# Altium PCB UZ_D_Template.PcbDoc
Units mm, origin at the board's own origin, x right, y up, seen from the top; angles counter-clockwise.
Board outline 155.99 x 100.01 mm, 4 copper layers (Top Layer, Layer 1, Layer 2, Bottom Layer), stack 0.98 mm thick; 60 components, 84 nets, 455 pads, 0 vias.
Unrouted connection lines stored in the file: 410.
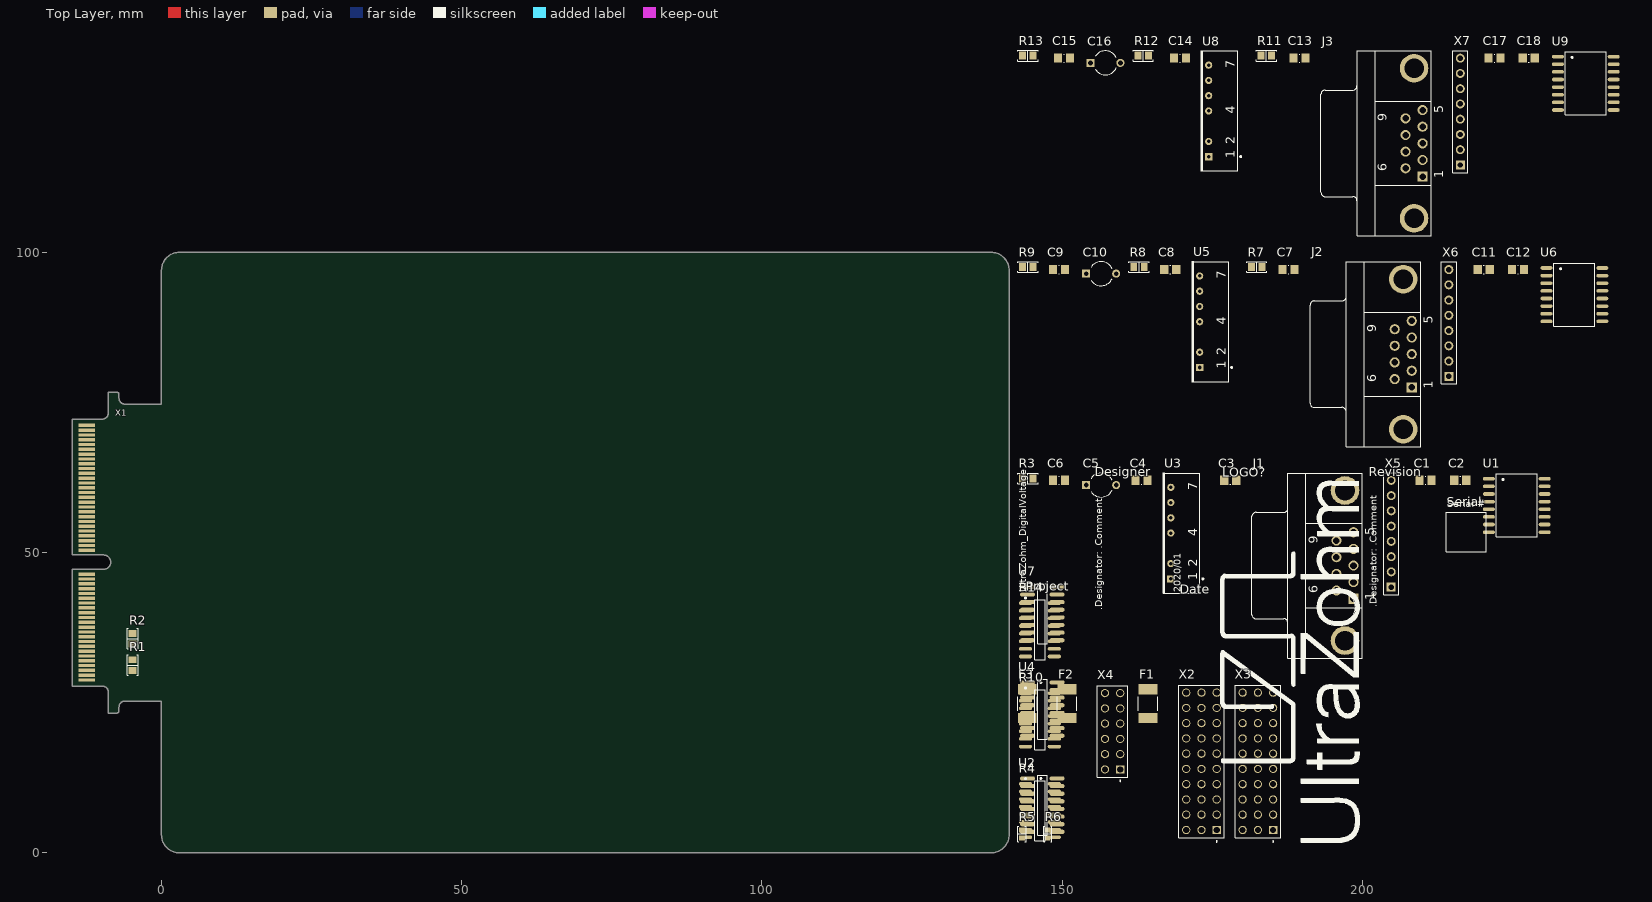
[diagram p0: Top Layer view]
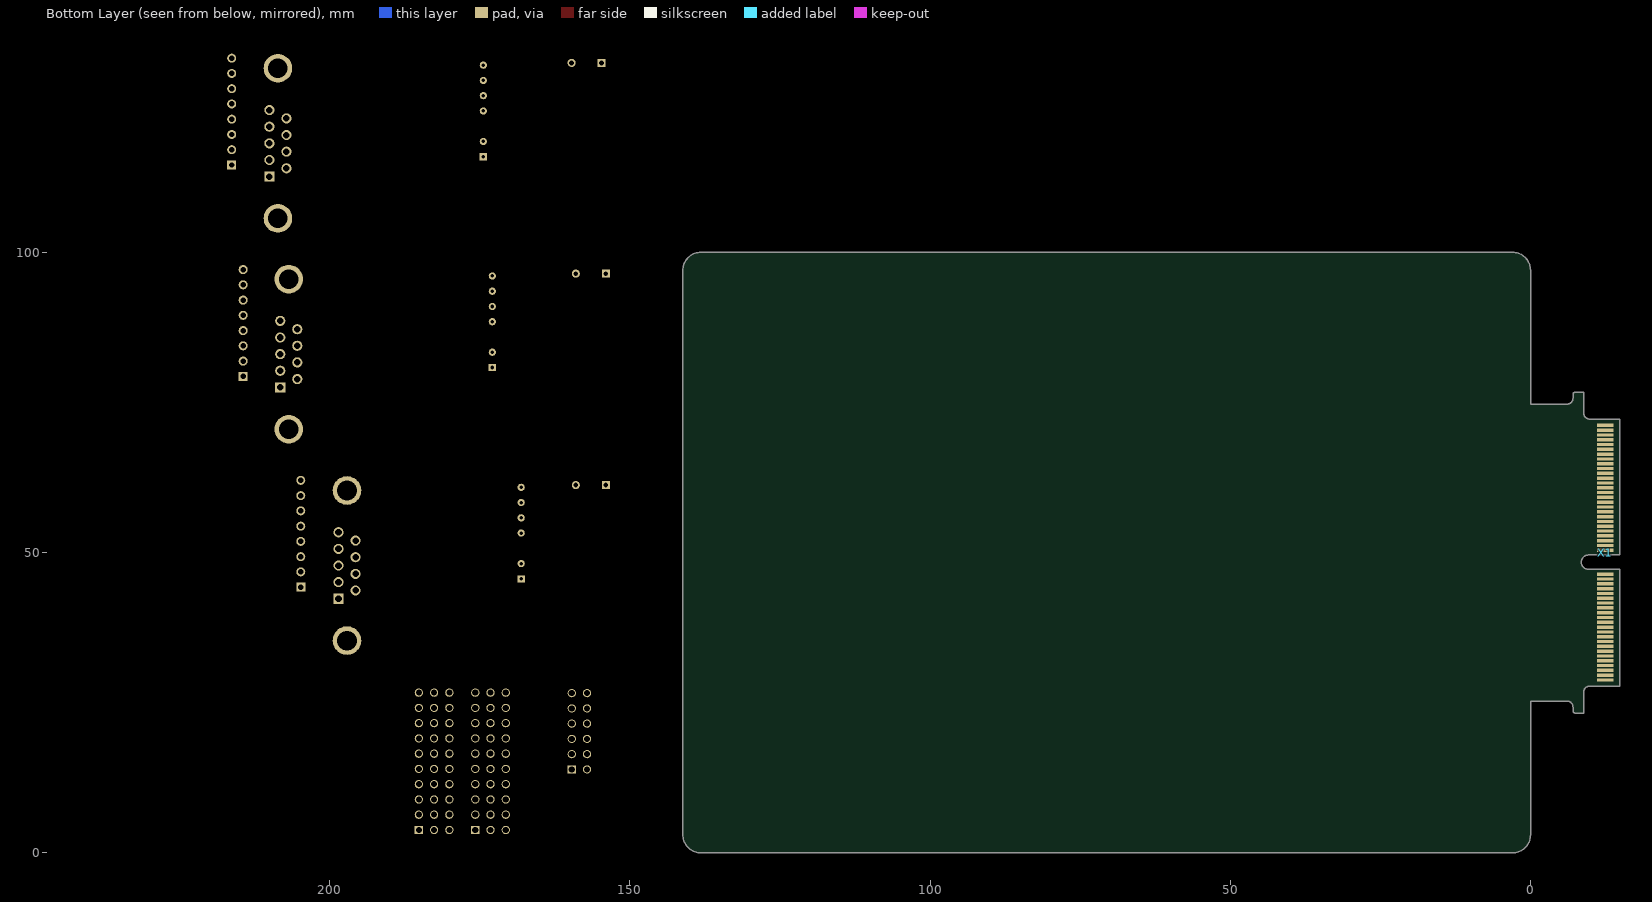
[diagram p1: Bottom Layer view, seen from below]

## Layer stack, top to bottom
Top Solder: solder mask 0.0102, Solder Resist, Dk 3.5
Top Layer: signal copper 0.035
Dielectric 2: prepreg 0.115, FR-4, Dk 4.4
Dielectric 4: prepreg 0.115, FR-4, Dk 4.4
Layer 1: signal copper 0.035
Dielectric 1: core 0.38, Core-036, Dk 4.4
Layer 2: signal copper 0.035
Dielectric 5: prepreg 0.115, FR-4, Dk 4.4
Dielectric 3: prepreg 0.115, FR-4, Dk 4.4
Bottom Layer: signal copper 0.035
Bottom Solder: solder mask 0.0102, Solder Resist, Dk 3.5

## Board outline
-14.853,27.775 -9.853,27.775 cw(c-9.853,26.775) -8.853,26.775 -8.853,23.275 -7.473,23.275 ccw(c-7.473,23.675) -7.073,23.675 -7.073,24.275 cw(c-6.073,24.275) -6.073,25.275 0,25.275 0,3 ccw(c3,3) 3,0 138.141,0 ccw(c138.141,3) 141.141,3 141.141,97 141.141,97.01 ccw(c138.141,97.01) 138.141,100.01 3,100 ccw(c3,97) 0,97 0,74.725 -6.073,74.725 cw(c-6.073,75.725) -7.073,75.725 -7.073,76.325 ccw(c-7.473,76.325) -7.473,76.725 -8.853,76.725 -8.853,73.225 cw(c-9.853,73.225) -9.853,72.225 -14.853,72.225 -14.853,49.6 -9.653,49.6 cw(c-9.653,48.4) -9.653,47.2 -14.853,47.2

## Design rules (kind name [scope] priority, off if disabled: settings)
AssemblyTestPointUsage [InNetClass('3V3_SingleEnded') or InNetClass('5V_SingleEnded') or InNetClass('15V_SingleEnded') or InNetClass('DifferentialSignals')] p1:
Clearance Clearance_Differential [InNetClass('DifferentialSignals')] p1: gap=0.1 ignorepadtopadclearanceinfootprint=TRUE except(0: Arc-Hole Track-Hole SMDPad-Hole THPad-Hole Via-Hole Fill-Hole Poly-Hole Region-Hole Text-Hole; 0.3: SMDPad-Via; 0.4: THPad-Via)
Clearance Clearance_Power [InNetClass('Power')] p2: gap=0.1 ignorepadtopadclearanceinfootprint=TRUE except(0: Arc-Hole Track-Hole SMDPad-Hole THPad-Hole Via-Hole Fill-Hole Poly-Hole Region-Hole Text-Hole; 0.15: Via-Poly; 0.2: Track-Poly; 0.25: THPad-Poly; 0.3: Fill-Poly Poly-Region; 0.5: Poly-Poly)
Clearance [All] p3: gap=0.1 ignorepadtopadclearanceinfootprint=TRUE except(0: Arc-Hole Track-Hole SMDPad-Hole THPad-Hole Via-Hole Fill-Hole Poly-Hole Region-Hole Text-Hole; 0.4: SMDPad-Via THPad-Via; 0.5: Poly-Poly)
ComponentClearance [All] p1: gap=0.1 collisioncheckmode=3 verticalgap=0.1 showdistances=FALSE
DiffPairsRouting [InNetClass('DifferentialSignals')] p1: maxlimit=0.25 minlimit=0.127 mostfreqgap=0.25 toplayer_maxgap=0.127 toplayer_prefgap=0.127 toplayer_minwidth=0.285 toplayer_maxwidth=0.285 toplayer_prefwidth=0.285 midlayer1_minwidth=0.069 midlayer1_maxwidth=0.15 midlayer1_prefwidth=0.15 midlayer2_mingap=0.165 midlayer2_minwidth=0.1 midlayer2_maxwidth=0.15 midlayer2_prefwidth=0.15 bottomlayer_maxgap=0.127 bottomlayer_prefgap=0.127 bottomlayer_minwidth=0.285 bottomlayer_maxwidth=0.285 bottomlayer_prefwidth=0.285 impedanceprofiledriven=TRUE impedanceprofileid={5F7DE71B-7B0B-4CDE-8AE7-8AD61221F3A5} impedanceprofilevalue=100.000000 maxuncoupledlength=12.7
FanoutControl Fanout_Power [InNetClass('Power') or InNet('ENABLE')] p1: bgadir=Out bgaviamode=Centered fanoutstyle=Auto fanoutdirection=None viagrid=0.025
FanoutControl Fanout_RS422 [InNetClass('DifferentialSignals')] p2: bgadir=Out bgaviamode=Closest fanoutstyle=Rows fanoutdirection=OutOnly viagrid=0.025
FanoutControl Fanout_BGA [IsBGA] p3 off: bgadir=Out bgaviamode=Centered fanoutstyle=Auto fanoutdirection=Alternating viagrid=0.025 // Fanout_BGA (Default Rule)
FanoutControl Fanout_LCC [IsLCC] p4 off: bgadir=Out bgaviamode=Centered fanoutstyle=Auto fanoutdirection=Alternating viagrid=0.025 // Fanout_LCC (Default Rule)
FanoutControl Fanout_SOIC [IsSOIC] p5 off: bgadir=Out bgaviamode=Centered fanoutstyle=Auto fanoutdirection=Alternating viagrid=0.025 // Fanout_SOIC (Default Rule)
FanoutControl Fanout_Small [(CompPinCount < 5)] p6 off: bgadir=Out bgaviamode=Centered fanoutstyle=Auto fanoutdirection=OutThenIn viagrid=0.025 // Fanout_Small (Default Rule)
FanoutControl Fanout_Default [All] p7: bgadir=NE bgaviamode=Closest fanoutstyle=Rows fanoutdirection=InOnly viagrid=0.025 // Fanout_Default (Default Rule)
Height [All] p1: minheight=0 maxheight=50 prefheight=12.7
HoleSize [All] p1: absolutevalues=TRUE maxlimit=4 minlimit=0.025 maxpercent=80.000 minpercent=20.000
PolygonConnect PolygonConnect_Therm [HoleSize > 2.6] p1: connectstyle=Direct reliefconductorwidth=0.254 reliefentries=4 polygonreliefangle="90 Angle" airgapwidth=0.254
PolygonConnect PolygonConnect_via [InPadClass('pad') or IsVia] p2: connectstyle=Direct reliefconductorwidth=0.254 reliefentries=4 polygonreliefangle="90 Angle" airgapwidth=0.254
PolygonConnect [All] p3: connectstyle=Relief reliefconductorwidth=0.3 reliefentries=4 polygonreliefangle="90 Angle" airgapwidth=0.25
RoomDefinition Encoder2 [InComponentClass('Encoder2')] p1: confinementstyle=ConfineIn formatcopy=TRUE lockcomponents=FALSE outline 142.279,17.547 151.179,17.547 151.179,32.247 142.279,32.247
RoomDefinition Encoder1 [InComponentClass('Encoder1')] p2: confinementstyle=ConfineIn formatcopy=TRUE lockcomponents=FALSE outline 142.279,1.547 151.179,1.547 151.179,16.247 142.279,16.247
RoomDefinition Encoder3 [InComponentClass('Encoder3')] p3: confinementstyle=ConfineIn formatcopy=TRUE lockcomponents=FALSE outline -46.221,-26.353 4.579,-26.353 4.579,-0.953 -46.221,-0.953
RoomDefinition X1 [InComponentClass('X1')] p4: confinementstyle=ConfineIn formatcopy=TRUE lockcomponents=FALSE outline -46.221,-26.353 4.579,-26.353 4.579,-0.953 -46.221,-0.953
RoomDefinition Connector [InComponentClass('Connector')] p5: confinementstyle=ConfineIn formatcopy=TRUE lockcomponents=FALSE outline 142.279,1.547 186.879,1.547 186.879,30.947 142.279,30.947
RoutingLayers RoutingLayers_3V3Signals [InNetClass('3V3_SingleEnded')] p1 off: top layer_v5=TRUE mid layer 1_v5=TRUE mid layer 2_v5=TRUE bottom layer_v5=TRUE
RoutingLayers RoutingLayers_SingleEnded [InNetClass('15V_SingleEnded') or InNetClass('3V3_SingleEnded') or InNetClass('5V_SingleEnded')] p2 off: top layer_v5=TRUE mid layer 1_v5=TRUE mid layer 2_v5=TRUE bottom layer_v5=TRUE
RoutingLayers RoutingLayers_Differential [InNetClass('DifferentialSignals')] p3 off: top layer_v5=TRUE mid layer 1_v5=TRUE mid layer 2_v5=TRUE bottom layer_v5=FALSE
RoutingLayers [All] p4: top layer_v5=TRUE mid layer 1_v5=TRUE mid layer 2_v5=TRUE bottom layer_v5=TRUE
RoutingVias [All] p1: holewidth=0.3 width=0.5 viastyle="Through Hole" minholewidth=0.2 minwidth=0.4 maxholewidth=0.5 maxwidth=1
SolderMaskExpansion [All] p1: expansion=0.102 istentingtop=FALSE
UnRoutedNet UnRoutedNet_Signals [InNetClass('15V_SingleEnded') or InNetClass('3V3_SingleEnded') or InNetClass('5V_SingleEnded') or InNetClass('DifferentialSignals')] p1: checkbadconnections=TRUE
UnRoutedNet [All] p2: checkbadconnections=TRUE
Width Width_Power [InNetClass('Power')] p1: maxlimit=10 minlimit=0.2 preferedwidth=0.3 minimp=50.000000 maximp=50.000000 favimp=50.000000
Width [All] p2: maxlimit=10 minlimit=0.1 preferedwidth=0.3 midlayer1_prefwidth=0.15 midlayer2_prefwidth=0.15 minimp=50.000000 maximp=50.000000 favimp=50.000000
18 further rules are at their usual default settings.

## Classes and differential pairs
component class Encoder2: C7 C8 C9 C10 C11 C12 J2 R7 R8 R9 R10 U4 U5 U6 X6
component class Encoder1: C1 C2 C3 C4 C5 C6 J1 R1 R2 R3 R4 U1 U2 U3 X5
component class Encoder3: C13 C14 C15 C16 C17 C18 J3 R11 R12 R13 R14 U7 U8 U9 X7
component class Connector: F1 F2 F3 X2 X3 X4
component class X1: R5 R6 X1

## Components (designator, comment, footprint, x,y, rotation, side; value= is the part's Value field where it differs from the comment)
C1 "0.1 µF" C_0805 210.479,62.047 r0 top
C2 "0.1 µF" C_0805 216.279,62.047 r0 top
C3 "0.01 µF" C_0805 177.979,62.047 r0 top
C4 "0.01 µF" C_0805 163.179,62.047 r0 top
C5 "10 µF" CAPR5-4X5 156.479,61.247 r0 top
C6 "0.01 µF" C_0805 149.479,62.047 r0 top
C7 "0.01 µF" C_0805 187.679,97.147 r0 top
C8 "0.01 µF" C_0805 167.979,97.147 r0 top
C9 "0.01 µF" C_0805 149.479,97.147 r0 top
C10 "10 µF" CAPR5-4X5 156.479,96.447 r0 top
C11 "0.1 µF" C_0805 220.179,97.147 r0 top
C12 "0.1 µF" C_0805 225.879,97.147 r0 top
C13 "0.01 µF" C_0805 189.479,132.347 r0 top
C14 "0.01 µF" C_0805 169.579,132.347 r0 top
C15 "0.01 µF" C_0805 150.279,132.347 r0 top
C16 "10 µF" CAPR5-4X5 157.179,131.547 r0 top
C17 "0.1 µF" C_0805 221.979,132.347 r0 top
C18 "0.1 µF" C_0805 227.679,132.347 r0 top
Date "2020/01" COMMENT 169.479,42.247 r90 top
Designer "Michaela Hlatky" Designator:comment 156.479,40.547 r90 top
F1 "Littelfuse_PTC_1812" 1812_PTC_Polyfuse_Littelfuse 164.279,24.847 r90 top value="PTC, 1.1 A, 24V"
F2 "Littelfuse_PTC_1812" 1812_PTC_Polyfuse_Littelfuse 150.779,24.847 r90 top value="PTC, 1.1 A, 24V"
F3 "Littelfuse_PTC_1812" 1812_PTC_Polyfuse_Littelfuse 144.179,24.847 r90 top value="PTC, 1.1 A, 24V"
J1 "DSUB1.385-2H9" DSUB1.385-2H9 187.579,47.847 r90 top
J2 "DSUB1.385-2H9" DSUB1.385-2H9 197.279,83.047 r90 top
J3 "DSUB1.385-2H9" DSUB1.385-2H9 199.079,118.147 r90 top
LOGO? "UZ Logo" UZ_Logo_large 199.479,2.047 r90 top
Project "UltraZohm_DigitalVoltage" COMMENT 143.779,42.247 r90 top
R1 "120" "RES 0805_2012" -4.8,31.275 r90 top value=11k8
R2 "120" "RES 0805_2012" -4.8,35.675 r90 top value=11k8
R3 "120" "RES 0805_2012" 144.279,62.347 r0 top value=11k8
R4 "Res Pack3" SO-16_N 146.279,7.047 r0 top value=4.7K
R5 "R_TF" "RES 0603_1608" 143.279,3.147 r90 top value=0R
R6 "R_TF" "RES 0603_1608" 147.579,3.147 r90 top value=0R
R7 "120" "RES 0805_2012" 182.379,97.547 r0 top value=11k8
R8 "120" "RES 0805_2012" 162.779,97.547 r0 top value=11k8
R9 "120" "RES 0805_2012" 144.279,97.547 r0 top value=11k8
R10 "Res Pack3" SO-16_N 146.279,22.147 r0 top value=4.7K
R11 "120" "RES 0805_2012" 183.979,132.747 r0 top value=11k8
R12 "120" "RES 0805_2012" 163.479,132.747 r0 top value=11k8
R13 "120" "RES 0805_2012" 144.279,132.747 r0 top value=11k8
R14 "Res Pack3" SO-16_N 146.279,37.147 r0 top value=4.7K
Revision "1v00" Designator:comment 202.179,41.047 r90 top
Serial "Serial #" SERIAL 215.979,55.547 r0 top
U1 "ISO7230MDW" "TI ISO7230 SOIC" 225.679,57.847 r0 top
U2 "DS26LS32ACM" M16A_M 146.679,7.947 r0 top
U3 "TMH 0505S" SIL-6(7) 168.079,53.247 r90 top
U4 "DS26LS32ACM" M16A_M 146.679,23.947 r0 top
U5 "TMH 0505S" SIL-6(7) 172.879,88.447 r90 top
U6 "ISO7230MDW" "TI ISO7230 SOIC" 235.279,92.947 r0 top
U7 "DS26LS32ACM" M16A_M 146.679,39.847 r0 top
U8 "TMH 0505S" SIL-6(7) 174.379,123.547 r90 top
U9 "ISO7230MDW" "TI ISO7230 SOIC" 237.179,128.147 r0 top
X1 "HSEC8-150-01-XX-DV-A-BL-CARD" HSEC8-150-01-XX-DV-A-BL-CARD -14.84,49.991 r270 bottom
X2 "Pin Header" SAMTEC_TSW-110-07-F-T 173.179,15.247 r90 top
X3 "Pin Header" SAMTEC_TSW-110-07-F-T 182.579,15.247 r90 top
X4 "Pin Header" SAMTEC_TSW-106-07-F-D 158.379,20.247 r90 top
X5 "Pin Header" HDR1X8 204.779,44.247 r90 top
X6 "Pin Header" HDR1X8 214.379,79.347 r90 top
X7 "Pin Header" HDR1X8 216.279,114.547 r90 top

## Footprints (in the part's own frame and the unit in brackets; to place one, negate y for a bottom-side part, rotate by r counter-clockwise, add the part's x,y. Pads: shape width x height; smd on the part's side, far side on the other; paste and mask are expansions set on the pad)
1812_PTC_Polyfuse_Littelfuse [mm] "Chip Fuse, 2-Leads, Body 4.6x3.24mm"
  rect 1.68x3.14 smd: 1(-2.39,0) 2(2.39,0)
  silkscreen extent -1.15,-1.62 1.15,1.62, body extent -2.3,-1.62 2.3,1.62, height 1.15
C_0805 [mm] "Chip Capacitor, Body 2.0x1.2mm, Height 1.45mm, IPC Low Density"
  rect 1.35x1.55 smd: 1(-1,0) 2(1,0)
  silkscreen extent -0.05,-0.67 0.05,0.67, body extent -1.1,-0.72 1.1,0.72, height 1.45
CAPR5-4X5 [mm] "Capacitor; 2 Leads"
  rect 1.35x1.35 hole 0.8: 1(-2.5,0)
  round 1.35 hole 0.8: 2(2.5,0)
  silkscreen extent -1.69,-2 1.82,2
COMMENT [mm] "prints out the comment of a component"
Designator:comment [mm] "prints out designator and comment of a component"
DSUB1.385-2H9 [mm] "Connector; D Subminiature; 9 Position; Right Angle; Pitch 1.385 mm"
  rect 1.69x1.69 hole 1.09: 1(-5.54,-10.92)
  round 1.69 hole 1.09: 2(-2.77,-10.92) 3(0,-10.92) 4(2.77,-10.92) 5(5.54,-10.92) 6(-4.155,-8.08) 7(-1.385,-8.08) 8(1.385,-8.08) 9(4.155,-8.08)
  round 4.76 hole 3.26: 10(-12.495,-9.5) 11(12.495,-9.5)
  silkscreen extent -15.4,-12.4 15.4,6
HDR1X8 [mm] "Connector; Header; 8 Position"
  rect 1.5x1.5 hole 0.9: 1(0,0)
  round 1.5 hole 0.9: 2(2.54,0) 3(5.08,0) 4(7.62,0) 5(10.16,0) 6(12.7,0) 7(15.24,0) 8(17.78,0)
  silkscreen extent -1.27,-1.27 19.05,1.27
HSEC8-150-01-XX-DV-A-BL-CARD [mm]
  rect 0.55x2.8 smd far side mask+0.05: 1(-21.2,-2.4) 3(-20.4,-2.4) 5(-19.6,-2.4) 7(-18.8,-2.4) 9(-18,-2.4) 11(-17.2,-2.4) 13(-16.4,-2.4) 15(-15.6,-2.4) 17(-14.8,-2.4) 19(-14,-2.4) 21(-13.2,-2.4) 23(-12.4,-2.4) 25(-11.6,-2.4) 27(-10.8,-2.4) 29(-10,-2.4) 31(-9.2,-2.4) 33(-8.4,-2.4) 35(-7.6,-2.4) 37(-6.8,-2.4) 39(-6,-2.4) 41(-5.2,-2.4) 43(-4.4,-2.4) 45(-3.6,-2.4) 47(-2.8,-2.4) 49(-2,-2.4) 51(-1.2,-2.4) 53(-0.4,-2.4) 55(3.6,-2.4) 57(4.4,-2.4) 59(5.2,-2.4) 61(6,-2.4) 63(6.8,-2.4) 65(7.6,-2.4) 67(8.4,-2.4) 69(9.2,-2.4) 71(10,-2.4) 73(10.8,-2.4) 75(11.6,-2.4) 77(12.4,-2.4) 79(13.2,-2.4) 81(14,-2.4) 83(14.8,-2.4) 85(15.6,-2.4) 87(16.4,-2.4) 89(17.2,-2.4) 91(18,-2.4) 93(18.8,-2.4) 95(19.6,-2.4) 97(20.4,-2.4) 99(21.2,-2.4)
  rect 0.55x2.8 smd mask+0.05: 2(-21.2,-2.4) 4(-20.4,-2.4) 6(-19.6,-2.4) 8(-18.8,-2.4) 10(-18,-2.4) 12(-17.2,-2.4) 14(-16.4,-2.4) 16(-15.6,-2.4) 18(-14.8,-2.4) 20(-14,-2.4) 22(-13.2,-2.4) 24(-12.4,-2.4) 26(-11.6,-2.4) 28(-10.8,-2.4) 30(-10,-2.4) 32(-9.2,-2.4) 34(-8.4,-2.4) 36(-7.6,-2.4) 38(-6.8,-2.4) 40(-6,-2.4) 42(-5.2,-2.4) 44(-4.4,-2.4) 46(-3.6,-2.4) 48(-2.8,-2.4) 50(-2,-2.4) 52(-1.2,-2.4) 54(-0.4,-2.4) 56(3.6,-2.4) 58(4.4,-2.4) 60(5.2,-2.4) 62(6,-2.4) 64(6.8,-2.4) 66(7.6,-2.4) 68(8.4,-2.4) 70(9.2,-2.4) 72(10,-2.4) 74(10.8,-2.4) 76(11.6,-2.4) 78(12.4,-2.4) 80(13.2,-2.4) 82(14,-2.4) 84(14.8,-2.4) 86(15.6,-2.4) 88(16.4,-2.4) 90(17.2,-2.4) 92(18,-2.4) 94(18.8,-2.4) 96(19.6,-2.4) 98(20.4,-2.4) 100(21.2,-2.4)
M16A_M [mm] "SOIC, 16-Leads, Body 9.9x3.9mm, Pitch 1.27mm, IPC Low Density"
  oval 2.5x0.7 smd: 1(-2.45,4.445) 2(-2.45,3.175) 3(-2.45,1.905) 4(-2.45,0.635) 5(-2.45,-0.635) 6(-2.45,-1.905) 7(-2.45,-3.175) 8(-2.45,-4.445) 9(2.45,-4.445) 10(2.45,-3.175) 11(2.45,-1.905) 12(2.45,-0.635) 13(2.45,0.635) 14(2.45,1.905) 15(2.45,3.175) 16(2.45,4.445)
  silkscreen extent -0.8,-5 0.8,5, body extent -2,-5 2,5, height 1.75
"RES 0603_1608" [mm] "Chip Resistor, 2-Leads, Body 1.60x0.80mm, IPC Medium Density"
  rect 0.85x0.95 smd: 1(-0.65,0) 2(0.65,0)
  silkscreen extent -1.27,-0.7 1.27,0.7, body extent -0.8,-0.4 0.8,0.4, height 0.45
"RES 0805_2012" [mm] "Chip Resistor, 2-Leads, Body 2.00x1.25mm, IPC Medium Density"
  rect 1.15x1.35 smd: 1(-0.875,0) 2(0.875,0)
  silkscreen extent -1.7,-0.9 1.7,0.9, body extent -1,-0.62 1,0.63, height 0.6
SAMTEC_TSW-106-07-F-D [mm]
  rect 1.37x1.37 hole 1.02: 01(-6.35,-1.27)
  round 1.37 hole 1.02: 02(-6.35,1.27) 03(-3.81,-1.27) 04(-3.81,1.27) 05(-1.27,-1.27) 06(-1.27,1.27) 07(1.27,-1.27) 08(1.27,1.27) 09(3.81,-1.27) 10(3.81,1.27) 11(6.35,-1.27) 12(6.35,1.27)
  silkscreen extent -8.37,-2.54 7.62,2.54
SAMTEC_TSW-110-07-F-T [mm]
  rect 1.37x1.37 hole 1.02: 01(-11.43,-2.54)
  round 1.37 hole 1.02: 02(-11.43,0) 03(-11.43,2.54) 04(-8.89,-2.54) 05(-8.89,0) 06(-8.89,2.54) 07(-6.35,-2.54) 08(-6.35,0) 09(-6.35,2.54) 10(-3.81,-2.54) 11(-3.81,0) 12(-3.81,2.54) 13(-1.27,-2.54) 14(-1.27,0) 15(-1.27,2.54) 16(1.27,-2.54) 17(1.27,0) 18(1.27,2.54) 19(3.81,-2.54) 20(3.81,0) 21(3.81,2.54) 22(6.35,-2.54) 23(6.35,0) 24(6.35,2.54) 25(8.89,-2.54) 26(8.89,0) 27(8.89,2.54) 28(11.43,-2.54) 29(11.43,0) 30(11.43,2.54)
  silkscreen extent -13.45,-3.81 12.7,3.81
SERIAL [mm]
  silkscreen extent -2,-5.4 4.6,1.2
SIL-6(7) [mm] "SIP; 7 Leads (1 Absent); Body 19.5 x 6 mm (LxW typ); Pitch 2.54 mm"
  rect 1.2x1.2 hole 0.6: 1(-7.62,0)
  round 1.2 hole 0.6: 2(-5.08,0) 4(0,0) 5(2.54,0) 6(5.08,0) 7(7.62,0)
  silkscreen extent -10.1,-5.46 10.1,1.35, body extent -10.13,-6.47 9.37,1.13, height 10.5
SO-16_N [mm] "SOIC, 16-Leads, Body 9.9x3.9mm, Pitch 1.27mm, IPC Medium Density"
  oval 2.2x0.6 smd: 1(-2.4,4.445) 2(-2.4,3.175) 3(-2.4,1.905) 4(-2.4,0.635) 5(-2.4,-0.635) 6(-2.4,-1.905) 7(-2.4,-3.175) 8(-2.4,-4.445) 9(2.4,-4.445) 10(2.4,-3.175) 11(2.4,-1.905) 12(2.4,-0.635) 13(2.4,0.635) 14(2.4,1.905) 15(2.4,3.175) 16(2.4,4.445)
  silkscreen extent -2.52,-5 0.9,5.42, body extent -2,-5 2,5, height 1.75
"TI ISO7230 SOIC" [mm] "SOIC, 16-Leads, Body 10,30x7,50mm, Pitch 1,27mm, IPC Medium Density"
  oval 2x0.6 smd: 1(-4.65,4.445) 2(-4.65,3.175) 3(-4.65,1.905) 4(-4.65,0.635) 5(-4.65,-0.635) 6(-4.65,-1.905) 7(-4.65,-3.175) 8(-4.65,-4.445) 9(4.65,-4.445) 10(4.65,-3.175) 11(4.65,-1.905) 12(4.65,-0.635) 13(4.65,0.635) 14(4.65,1.905) 15(4.65,3.175) 16(4.65,4.445)
  silkscreen extent -3.4,-5.25 3.4,5.25, body extent -3.8,-5.25 3.8,5.25, height 2.65
UZ_Logo_large [mm] "logo width 6cm"
  silkscreen extent -0.3,-0.06 59.86,23.1

## Part data
C1 C2 C11 C12 C17 C18: library part C0805C104J5RECTU, "Capacitor 0805, 50 VDC, 0.1 µF, X7R", Device Package=0805, Manufacturer=KEMET, Operating Temperature="-55 - 125°C", Supplier Part Number 1=80-C0805C104J5RECTU, Tolerance="5 %", Voltage Rating="50 VDC", Component Type="Capacitor 0805", ComponentLink1Description=Datasheet, ComponentLink1URL=https://www.mouser.de/datasheet/2/212/KEM_C1002_X7R_SMD-1102033.pdf, Created from=MGremer, Created On="20.12.2020 13:54:13", Last Updated="20.12.2020 16:34:30", Live Cycle Status=1, Manufacturer Part Number=C0805C104J5RECTU, Mounting Type=SMD, PartID=17, Series="SMD Comm X7R", Stock number="Labor SMD Container", Supplier 1=Mouser, Type=Capacitor
C3 C4 C6 C7 C8 C9 C13 C14 C15: library part GRM21BR72A103KA01L, "Capacitor 0805, 100 VDC, 0.01 µF, X7R", Device Package=0805, Manufacturer="Murata Electronics", Operating Temperature="-55 - 125°C", Supplier Part Number 1=81-GRM21BR72A103K, Tolerance="10 %", Voltage Rating="100 VDC", Component Type="Capacitor 0805", ComponentLink1Description=Datasheet, ComponentLink1URL=https://www.mouser.de/datasheet/2/281/1/GRM21BR72A103KA01_01C-1986947.pdf, Created from=MGremer, Created On="20.12.2020 13:54:13", Last Updated="17.11.2021 11:27:00", Live Cycle Status=1, Manufacturer Part Number=GRM21BR72A103KA01L, Mounting Type=SMD, PartID=86, Series=GRM, Stock number="not stored", Supplier 1=Mouser, Type=Capacitor
C5 C10 C16: library part CAPR5-4X5, "Capacitor; 2 Leads", Component Type=Capacitor, ComponentLink1Description=Datasheet, Created from=MHlatky, Created On="25.05.2021 10:46:00", Last Updated="30.11.2021 13:37:41", Live Cycle Status=1, Manufacturer Part Number=CAPR5-4X5, PackageDescription="Capacitor; 2 Leads", PackageReference=CAPR5-4X5, PartID=5, Published=23-Sep-2002, Publisher="Altium Limited", Supplier Part Number 1=CAPR5-4X5, Type=Capacitor
Date: library part 5, "Create a project parameter named \"FinDate\" this is the value of this component. It is printed on the PCB. Once the parameter is updated (e.g. new revision) it gets updated on the PCB as well", Manufacturer="PCB Manufacturer", Manufacturer Part Number="Project End Date", Component Type="Date of Project Finalization", Created from="T. Wendt", Created On="01.03.2021 09:01:41", Last Updated="01.03.2021 09:01:41", Live Cycle Status=1, PartID=5, Type="Standard (No BOM)"
Designer: library part 4, "Create a project parameter named \"Author\" this is the value of this component. It is printed on the PCB. Once the parameter is updated (e.g. new revision) it gets updated on the PCB as well", Manufacturer="PCB Manufacturer", Manufacturer Part Number="Project Author", Component Type="Project Author", Created from="T. Wendt", Created On="01.03.2021 08:53:41", Last Updated="01.03.2021 09:20:27", Live Cycle Status=1, PartID=4, Type="Standard (No BOM)"
F1 F2 F3: "POLYSWITCH RESETTABLE DEVICES", Hold Current=1.1A, Manufacturer=Littelfuse, MPN=miniASMDC110F/24, Nominal current="1 A", Operating Temperature="-40 - 85 °C", Package=1812, Resistance="0.18 Ohm", Trip Current=2.2A, Voltage=24V, Component Type=Littelfuse_PTC_1812, ComponentLink1Description=Datasheet, ComponentLink1URL=https://www.littelfuse.com/~/media/electronics/datasheets/resettable_ptcs/littelfuse_ptc_surface_mount_catalog_datasheet.pdf.pdf, Created=2019_02_10_AGeiger, Created from=MHlatky, Created On="07.05.2021 06:50:33", Last Updated="20.12.2021 12:44:16", Live Cycle Status=1, Manufacturer Part Number=Littelfuse_PTC_1812, MF=Littelfuse, Mounting Type=SMD, PartID=5, Type=Fuse
J1 J2 J3: "Connector; D Subminiature; 9 Position; Right Angle; Pitch 1.385 mm", Device Package=-, Manufacturer=Altium, PackageDocument=O, Component Type="DSUB Connector", ComponentLink1Description=Datasheet, ComponentLink1URL=[NULL], Created from=MHlatky, Created On="26.01.2021 09:19:51", DatasheetDocument=1-Sep-1999, Gender=Receptacle, Last Updated="20.12.2021 09:43:18", LatestRevisionDate=17-Jul-2002, LatestRevisionNote="Re-released for DXP Platform.", Live Cycle Status=1, Manufacturer Part Number=DSUB1.385-2H9, Orientation="Right Angle", PackageReference=788750, PartID=15, Positions=9, Published=15-Jun-2001, Publisher="Altium Limited", Stock number="not stored", Type="DSUB Connector"
LOGO?: library part 1, "Official Project Logo of the UltraZohm", Manufacturer="PCB Manufacturer", Manufacturer Part Number="UltraZohm Logo", Component Type=Logo, ComponentLink1Description=Homepage, ComponentLink1URL=https://ultrazohm.com, Created from="T. Wendt", Created On="19.02.2021 16:55:56", Last Updated="02.03.2021 14:31:24", Live Cycle Status=1, PartID=1, Type="Standard (No BOM)"
Project: library part 2, "Create a project parameter named \"ProjectNameCustom\" this is the value of this component and it is printed on the PCB.", Manufacturer="PCB Manufacturer", Manufacturer Part Number="Project Name", Component Type="Project Name", Created from="T. Wendt", Created On="01.03.2021 08:43:57", Last Updated="01.03.2021 09:07:27", Live Cycle Status=1, PartID=2, Type="Standard (No BOM)"
R1 R2 R3 R7 R8 R9 R11 R12 R13: library part ERJ-6ENF1182V, "SMD resistor 1%", Device Package=0805, Manufacturer=Panasonic, Supplier Part Number 1=667-ERJ-6ENF1182V, Tolerance=1%, Component Type="SMD resistor", ComponentLink1Description=Datasheet, ComponentLink1URL=https://www.mouser.de/datasheet/2/315/AOA0000C304-1149620.pdf, Created from=MGremer, Created On="14.12.2020 16:17:14", Last Updated="14.12.2020 18:22:52", Live Cycle Status=1, Manufacturer Part Number=ERJ-6ENF1182V, Mounting Type=SMD, PartID=148, Stock number="not stored", Supplier 1=Mouser, Type=Resistor
R4 R10 R14: "SOIC, 16-Leads, Body 9.9x3.9mm, Pitch 1.27mm, IPC Medium Density", Device Package=SOIC, Code_IPC=SOIC127P600-16, Code_JEDEC=MS-012-AC, Component Type="Res Pack3", ComponentLink1Description=Datasheet, Created from=MHlatky, Created On="14.12.2020 16:17:14", Last Updated="20.12.2021 09:54:47", LatestRevisionDate=29-May-2009, LatestRevisionNote="IPC-7351 Footprint Added.", Live Cycle Status=1, Manufacturer Part Number="Res Pack3", Mounting Type=SMD, PackageDescription="16-Pin Small Outline Integrated Circuit 1.27 mm Pitch", PackageReference=SO-16, PartID=207, Published=24-Mar-1999, Publisher="Altium Limited", Supplier 1=Altium, Type=Resistor
R5 R6: library part RC0603JR-070RL, "SMD resistor E24 series", Device Package=0603, LCSC Part Number=C21189, Manufacturer=YAGEO, Supplier Part Number 1=603-RC0603JR-070RL, Tolerance=5%, Component Type="SMD resistor", ComponentLink1Description=Datasheet, ComponentLink1URL=https://www.mouser.de/datasheet/2/447/PYu-RC_Group_51_RoHS_L_10-1664068.pdf, Created from=MGremer, Created On="14.12.2020 16:17:14", Last Updated="04.03.2021 09:09:42", Live Cycle Status=1, Manufacturer Part Number=RC0603JR-070RL, Mounting Type=SMD, PartID=1, Stock number="Labor SMD Container", Supplier 1=Mouser, Supplier 2=LCSC, Supplier Part Number 2=C21189, Type=Resistor
Revision: library part 3, "Create a project parameter named \"ProjectRevision\" this is the value of this component. It is printed on the PCB. Once the parameter is updated (e.g. new revision) it gets updated on the PCB as well", Manufacturer="PCB Manufacturer", Manufacturer Part Number="Project Revision", Component Type="Project Revision", Created from="T. Wendt", Created On="01.03.2021 08:50:34", Last Updated="01.03.2021 09:28:36", Live Cycle Status=1, PartID=3, Type="Standard (No BOM)"
Serial: library part 6, "Field to put in a serial number", Manufacturer="PCB Manufacturer", Manufacturer Part Number="Serial Number", Component Type="Serial Number", Created from="T. Wendt", Created On="02.03.2021 14:31:24", Last Updated="02.03.2021 14:31:24", Live Cycle Status=1, PartID=6, Type="Standard (No BOM)"
U1 U6 U9: "ISO723xx High-Speed, Triple-Channel Digital Isolators", Manufacturer="Analog Devices", Operating Temperature="-40 - +125 °C", Supplier Part Number 1=595-ISO7230MDW, Component Type=Microcontroller, ComponentLink1Description=Datasheet, ComponentLink1URL=https://www.ti.com/lit/ds/symlink/iso7230m.pdf?HQS=dis-mous-null-mousermode-dsf-pf-null-wwe&ts=1639988443497&ref_url=https%253A%252F%252Fwww.mouser.de%252F, Created from=MHlatky, Created On="26.01.2021 09:03:43", Last Updated="17.06.2021 08:32:47", Live Cycle Status=1, Manufacturer Part Number=ISO7230MDW, Mounting Type=SOIC, PartID=5, Stock number="not stored", Supplier 1=Mouser, Type=Microcontroller
U2 U4 U7: "DS26LS32AC/DS26LS32C/DS26LS32M/DS26LS33M Quad Differential Line Receivers", Manufacturer="Texas Instruments", Operating Temperature="0 - 70 °C", PackageTopMarking=NSUZXYTTE#*DS26LS32*ACM, PowerWise=N, Supplier Part Number 1=926-DS26LS32ACM, Code_IPC=SOIC127P600-16, Code_JEDEC=MS-012-AC, Component Type=Microcontroller, ComponentLink1Description=Datasheet, ComponentLink1URL=https://media.digikey.com/pdf/Data%20Sheets/Texas%20Instruments%20PDFs/DS26LS32AC,C,M,DS26LS33M.pdf, ComponentLink2Description="DS26LS32AC Web Page", ComponentLink2URL=http://www.national.com/pf/DS/DS26LS32AC.html, ComponentLink3Description="M16A Package Page", ComponentLink3URL=http://www.national.com/packaging/folders/m16a.html, CompType="Interface IC", Created from=MHlatky, Created On="26.01.2021 09:03:43", DatasheetVersion=May-1999, Last Updated="17.06.2021 08:32:47", Live Cycle Status=1, Manufacturer Part Number=DS26LS32ACM, Mounting Type=SOIC, PackageDescription="Molded Package, SO, .150in Wide, 16 Lead", PackageReference=M16A, PackageVersion="revJ, Aug-1995", PartID=6, PartNumber=DS26LS32ACM, PinCount=16, Published=4-Dec-2008, Publisher="Altium Limited", RoHS=N, Stock number="not stored", Supplier 1=Mouser, Type=Microcontroller
U3 U5 U8: "ISOLIERTE DC-DC-WANDLER Product Type: DC/DC; Package Style: SIP; Output Power (W): 2; Input Voltage: 5 VDC +/-10%; Output 1 (Vdc): 5; Output 2 (Vdc): N/A; Output 3 (Vdc): N/A", Device Package=SIP, Manufacturer=Traco, Operating Temperature="-40 - 85 °C", Supplier Part Number 1=495-TMH-0505S, Component Type="DC-DC Converter", ComponentLink1Description=Datasheet, ComponentLink1URL=https://www.tracopower.com/products/tmh.pdf, Created from=MHlatky, Created On="16.11.2021 07:44:11", Last Updated="16.11.2021 07:44:11", Live Cycle Status=1, Manufacturer Part Number="TMH 0505S", Mounting Type=SMD, PartID=20, Series=TMH, Stock number="not stored", Supplier 1=Mouser, Type="isolated DC-DC Converter"
X1: "Mating Card Layout for HSEC8-150-01-XX-DV-A-BL", Manufacturer=SAMTEC, Created=2018_04_23_AGeiger
X2 X3: library part TSW-110-07-F-T, "THROUGH-HOLE .025\" SQ POST HEADER", Device Package=THT, Manufacturer=SAMTEC, Operating Temperature="-55 +125 °C", Package=None, Supplier Part Number 1=200-TSW11007FT, Availability=Unavailable, Component Type="Pin Header", ComponentLink1Description=Datasheet, ComponentLink1URL=https://www.mouser.de/datasheet/2/527/tsw_th-2854687.pdf, Created from=MHlatky, Created On="22.11.2021 15:31:45", Last Updated="20.12.2021 07:38:08", Live Cycle Status=1, Manufacturer Part Number=TSW-110-07-F-T, MF="Samtec Inc.", Mounting Type=THT, MP=TSW-110-07-F-T, PartID=7, Price=None, Series=TSW, Stock number="not stored", Supplier 1=Mouser, Type="Pin Header"
X4: library part TSW-106-07-F-D, "THROUGH-HOLE .025\" SQ POST HEADER", Device Package=THT, Manufacturer=SAMTEC, Operating Temperature="-55 +125 °C", Package=None, Supplier Part Number 1=200-TSW10607FD, Availability=Unavailable, Component Type="Pin Header", ComponentLink1Description=Datasheet, ComponentLink1URL=https://www.mouser.de/datasheet/2/527/tsw_th-2854687.pdf, Created from=MHlatky, Created On="22.11.2021 15:31:45", Last Updated="20.12.2021 07:38:08", Live Cycle Status=1, Manufacturer Part Number=TSW-106-07-F-D, MF=Samtec, Mounting Type=THT, MP=TSW-106-07-F-D, PartID=8, Price=None, Series=TSW, Stock number="not stored", Supplier 1=Mouser, Type="Pin Header"
X5 X6 X7: library part HDR1X8, "8 Pin", Component Type="Pin Header", ComponentLink1Description=Datasheet, Created from=MHlatky, Created On="22.11.2021 15:31:45", Last Updated="20.12.2021 07:38:08", Live Cycle Status=1, Manufacturer Part Number=HDR1X8, PartID=9, Stock number="not stored", Supplier 1=Altium, Supplier Part Number 1=HDR1X8, Type="Pin Header"

## Nets (pads, with @x,y where several pads share a name; then routed paths per layer and width w, separated by ;. In a path a pad name is that pad's centre, name@x,y a point inside that pad or via, vN(x,y) a via of type N, cw(c..) or ccw(c..) an arc to the next point about the centre after c; other vN are vias at no path point)
3V3_PER: F3.1 X1.13 X1.14
3V3_PER_fused: F3.2 X4.09 X4.10
5V_PER: F2.1 X1.9 X1.10
5V_PER_fused: F2.2 X4.05 X4.06
+3V3: C2.2 C12.2 C18.2 U1.10 U1.16 U6.10 U6.16 U9.10 U9.16
+5: U3.1 U5.1 U8.1
A+_CH1: C3.2 C4.2 C6.2 J1.3 J1.4 J1.5 J1.7 J1.8 J1.9 R1.1 R2.1 R3.1 R4.1 R4.2 R4.3 R4.4 R4.5 R4.6 U2.1 U2.2 U2.6 U2.7 U2.14 U2.15 X5.1 X5.2 X5.3 X5.4 X5.5 X5.6
A+_CH2: C7.2 C8.2 C9.2 J2.3 J2.4 J2.5 J2.7 J2.8 J2.9 R7.1 R8.1 R9.1 R10.1 R10.2 R10.3 R10.4 R10.5 R10.6 U4.1 U4.2 U4.6 U4.7 U4.14 U4.15 X6.1 X6.2 X6.3 X6.4 X6.5 X6.6
A+_CH3: C13.2 C14.2 C15.2 J3.3 J3.4 J3.5 J3.7 J3.8 J3.9 R11.1 R12.1 R13.1 R14.1 R14.2 R14.3 R14.4 R14.5 R14.6 U7.1 U7.2 U7.6 U7.7 U7.14 U7.15 X7.1 X7.2 X7.3 X7.4 X7.5 X7.6
A_encoder1: U1.12 X1.45 X2.23
A_encoder2: U6.12 X1.50 X2.28
A_encoder3: U9.12 X1.57 X3.02
A_single_CH1: U1.5 U2.3
A_single_CH2: U4.3 U6.5
A_single_CH3: U7.3 U9.5
B_encoder1: U1.13 X1.42 X2.22
B_encoder2: U6.13 X1.49 X2.26
B_encoder3: U9.13 X1.54 X2.02
B_single_CH1: U1.4 U2.13
B_single_CH2: U4.13 U6.4
B_single_CH3: U7.13 U9.4
Collective_FLT: X1.96 X3.30
CPLD_DigIn_01: X1.83 X3.19
CPLD_DigIn_02: X1.85 X3.22
CPLD_DigOut_01: X1.84 X3.20
CPLD_DigOut_02: X1.86 X3.23
DIG_IO_00: X1.17 X2.01
DIG_IO_01: X1.18 X2.04
DIG_IO_02: X1.21 X2.05
DIG_IO_03: X1.22 X2.07
DIG_IO_04: X1.25 X2.08
DIG_IO_05: X1.26 X2.10
DIG_IO_06: X1.29 X2.11
DIG_IO_07: X1.30 X2.13
DIG_IO_08: X1.33 X2.14
DIG_IO_09: X1.34 X2.16
DIG_IO_10: X1.37 X2.17
DIG_IO_11: X1.38 X2.19
DIG_IO_12: U1.14 X1.41 X2.20
DIG_IO_15: U6.14 X1.46 X2.25
DIG_IO_18: U9.14 X1.53 X2.29
DIG_IO_21: X1.58 X3.01
DIG_IO_22: X1.61 X3.05
DIG_IO_23: X1.62 X3.04
DIG_IO_24: X1.65 X3.08
DIG_IO_25: X1.66 X3.07
DIG_IO_26: X1.69 X3.11
DIG_IO_27: X1.70 X3.10
DIG_IO_28: X1.73 X3.14
DIG_IO_29: X1.74 X3.13
DIG_Res_00: X1.78 X3.09
DIG_Res_01: X1.79 X3.12
DIG_Res_02: X1.80 X3.15
DIG_Res_03: X1.91 X3.18
DIG_Res_04: X1.92 X3.21
DIG_Res_05: X1.93 X3.24
DIG_Res_06: X1.94 X3.27
DIG_Res_07: X1.95 X3.16
DIG_Res_08: X1.77 X3.17
GND: C2.1 C12.1 C18.1 R5.1 U1.9 U1.15 U3.2 U5.2 U6.9 U6.15 U8.2 U9.9 U9.15 X1.1 X1.2 X1.3 X1.4 X1.7 X1.8 X1.11 X1.12 X1.15 X1.16 X1.19 X1.20 X1.23 X1.24 X1.27 X1.28 X1.31 X1.32 X1.35 X1.36 X1.39 X1.40 X1.43 X1.44 X1.47 X1.48 X1.51 X1.52 X1.55 X1.56 X1.59 X1.60 X1.63 X1.64 X1.67 X1.68 X1.71 X1.72 X1.75 X1.76 X1.81 X1.82 X1.87 X1.88 X1.97 X1.98 X2.03 X2.06 X2.09 X2.12 X2.15 X2.18 X2.21 X2.24 X2.27 X2.30 X3.03 X3.06 X4.03 X4.04 X4.07 X4.08 X4.11 X4.12
GND_ENC_CH1: C1.1 C5.2 J1.1 U1.2 U1.8 U2.8 U2.9 U2.10 U2.12 U3.4 X5.8
GND_ENC_CH2: C10.2 C11.1 J2.1 U4.8 U4.9 U4.10 U4.12 U5.4 U6.2 U6.8 X6.8
GND_ENC_CH3: C16.2 C17.1 J3.1 U7.8 U7.9 U7.10 U7.12 U8.4 U9.2 U9.8 X7.8
I2C0_SCA: X1.90 X3.26
I2C0_SCL: X1.89 X3.25
NetC3_1: C3.1 R1.2
NetC4_1: C4.1 R2.2
NetC6_1: C6.1 R3.2
NetC7_1: C7.1 R7.2
NetC8_1: C8.1 R8.2
NetC9_1: C9.1 R9.2
NetC13_1: C13.1 R11.2
NetC14_1: C14.1 R12.2
NetC15_1: C15.1 R13.2
PILOT_IN: R6.2 X1.100 X3.29
PILOT_OUT: R5.2 R6.1 X1.99 X3.28
VCC_ENC_CH1: C1.2 C5.1 J1.2 R4.9 R4.10 R4.11 R4.12 R4.13 R4.14 R4.15 R4.16 U1.1 U2.4 U2.16 U3.6 X5.7
VCC_ENC_CH2: C10.1 C11.2 J2.2 R10.9 R10.10 R10.11 R10.12 R10.13 R10.14 R10.15 R10.16 U4.4 U4.16 U5.6 U6.1 X6.7
VCC_ENC_CH3: C16.1 C17.2 J3.2 R14.9 R14.10 R14.11 R14.12 R14.13 R14.14 R14.15 R14.16 U7.4 U7.16 U8.6 U9.1 X7.7
VIN: F1.1 X1.5 X1.6
VIN_fused: F1.2 X4.01 X4.02
Z_single_CH1: U1.3 U2.5
Z_single_CH2: U4.5 U6.3
Z_single_CH3: U7.5 U9.3
pads on no net: J1.6 J1.10 J1.11 J2.6 J2.10 J2.11 J3.6 J3.10 J3.11 R4.7 R4.8 R10.7 R10.8 R14.7 R14.8 U1.6 U1.7 U1.11 U2.11 U3.5 U3.7 U4.11 U5.5 U5.7 U6.6 U6.7 U6.11 U7.11 U8.5 U8.7 U9.6 U9.7 U9.11

## Silkscreen, mask and mechanical layers (free items; w line width, h text height)
Mechanical 1:
  lines w0.1: 141.141,97 141.141,3 cw(c138.141,3) 138.141,0 3,0 cw(c3,3) 0,3 0,25.275 -6.073,25.275 ccw(c-6.073,24.275) -7.073,24.275 -7.073,23.675 cw(c-7.473,23.675) -7.473,23.275 -8.853,23.275 -8.853,26.775 ccw(c-9.853,26.775) -9.853,27.775 -14.853,27.775 -14.853,47.2 -9.653,47.2 ccw(c-9.653,48.4) -9.653,49.6 -14.853,49.6 -14.853,72.225 -9.853,72.225 ccw(c-9.853,73.225) -8.853,73.225 -8.853,76.725 -7.473,76.725 cw(c-7.473,76.325) -7.073,76.325 -7.073,75.725 ccw(c-6.073,75.725) -6.073,74.725 0,74.725 0,97 cw(c3,97) 3,100 138.141,100.01 cw(c138.141,97.01) 141.141,97.01

## Dimensions
141.141,0 to 141.141,100 on Mechanical 2
146.143,97.802 to -14.84,72.216 on Mechanical 2
141.141,100 to -14.853,72.225 on Mechanical 2
141.141,100 to 0.031,100 on Mechanical 2

## Text inside footprints (layer, text, board x,y; h text height)
J1: Top Overlay "6" at 192.554,43.192 h1.5 r90; Top Overlay "9" at 192.554,51.502 h1.5 r90; Top Overlay "5" at 201.954,52.887 h1.5 r90; Top Overlay "1" at 201.954,42.057 h1.5 r90
J2: Top Overlay "6" at 202.254,78.392 h1.5 r90; Top Overlay "9" at 202.254,86.702 h1.5 r90; Top Overlay "5" at 211.654,88.087 h1.5 r90; Top Overlay "1" at 211.654,77.257 h1.5 r90
J3: Top Overlay "6" at 204.054,113.492 h1.5 r90; Top Overlay "9" at 204.054,121.802 h1.5 r90; Top Overlay "5" at 213.454,123.187 h1.5 r90; Top Overlay "1" at 213.454,112.357 h1.5 r90
U3: Top Overlay "1" at 172.454,45.377 h1.5 r90; Top Overlay "7" at 172.454,60.367 h1.5 r90; Top Overlay "4" at 172.454,52.747 h1.5 r90; Top Overlay "2" at 172.454,47.667 h1.5 r90
U5: Top Overlay "1" at 177.254,80.577 h1.5 r90; Top Overlay "7" at 177.254,95.567 h1.5 r90; Top Overlay "4" at 177.254,87.947 h1.5 r90; Top Overlay "2" at 177.254,82.867 h1.5 r90
U8: Top Overlay "1" at 178.754,115.677 h1.5 r90; Top Overlay "7" at 178.754,130.667 h1.5 r90; Top Overlay "4" at 178.754,123.047 h1.5 r90; Top Overlay "2" at 178.754,117.967 h1.5 r90